# Altium PCB UZ_D_Inverter.PcbDoc
Units mm, origin at the board's own origin, x right, y up, seen from the top; angles counter-clockwise.
Board outline 155.99 x 100.01 mm, 6 copper layers (Top Copper, Signal Layer 1, Signal Layer 2, Signal Layer 3, Signal Layer 4, Bottom Copper), stack 1.597 mm thick; 16 components, 56 nets, 155 pads, 0 vias.
Unrouted connection lines stored in the file: 166.
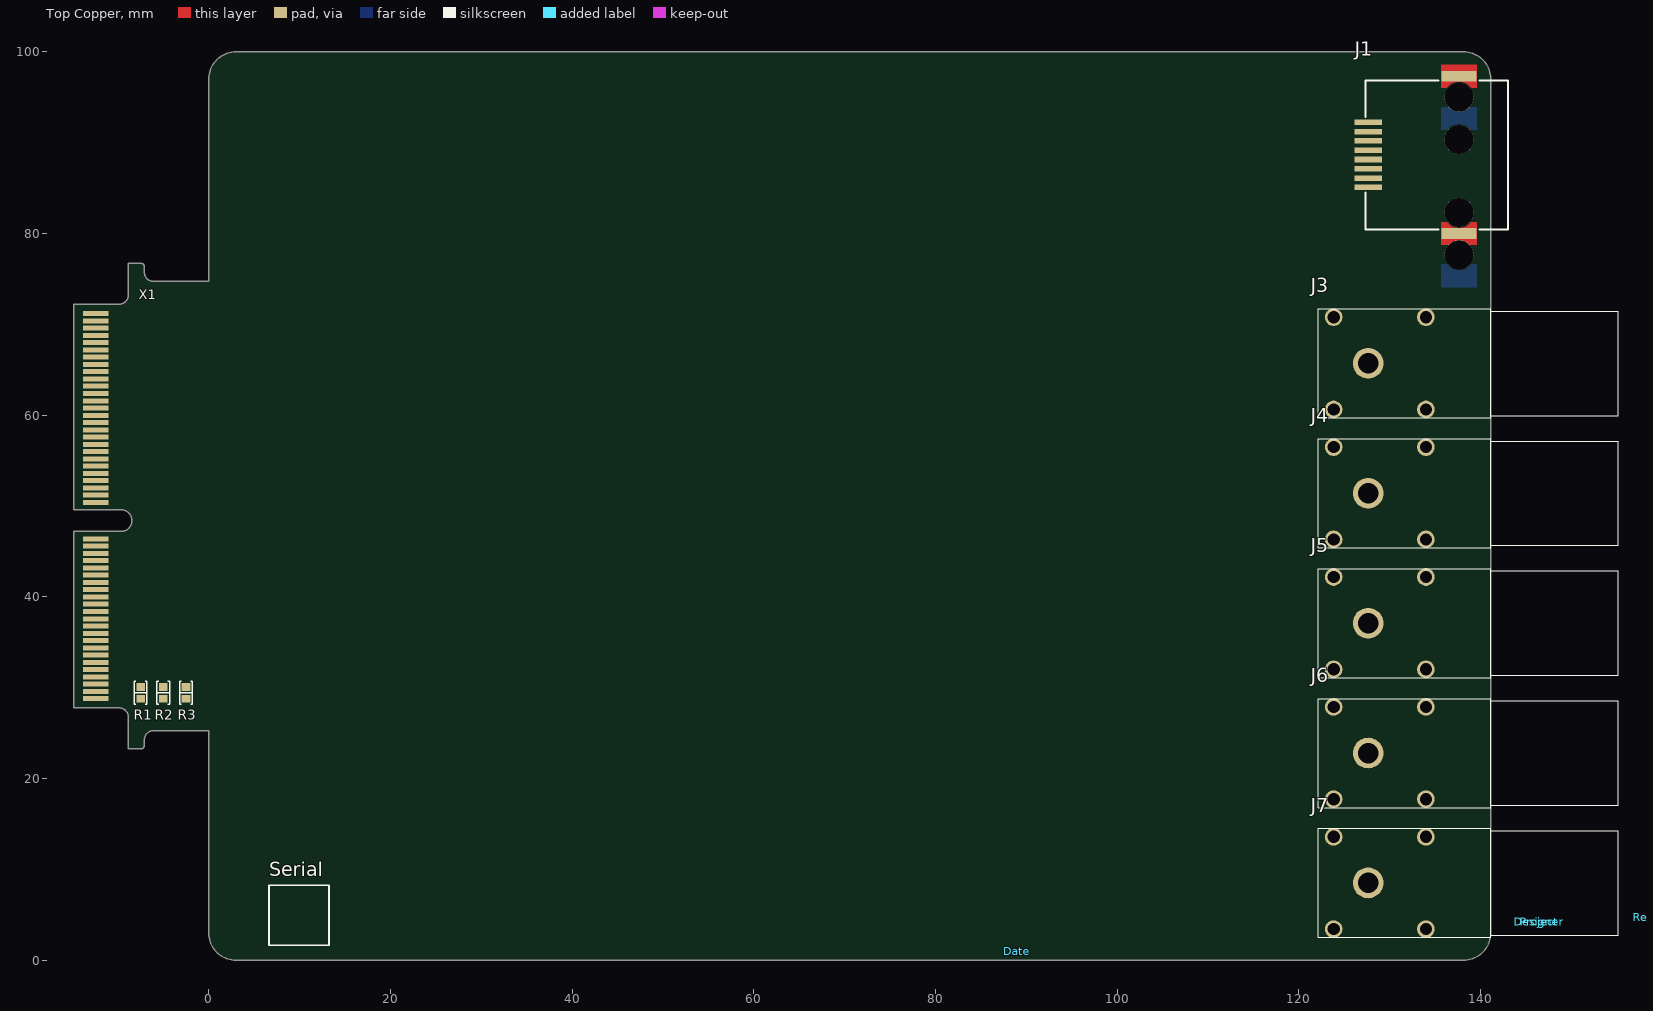
[diagram p0: Top Copper view]
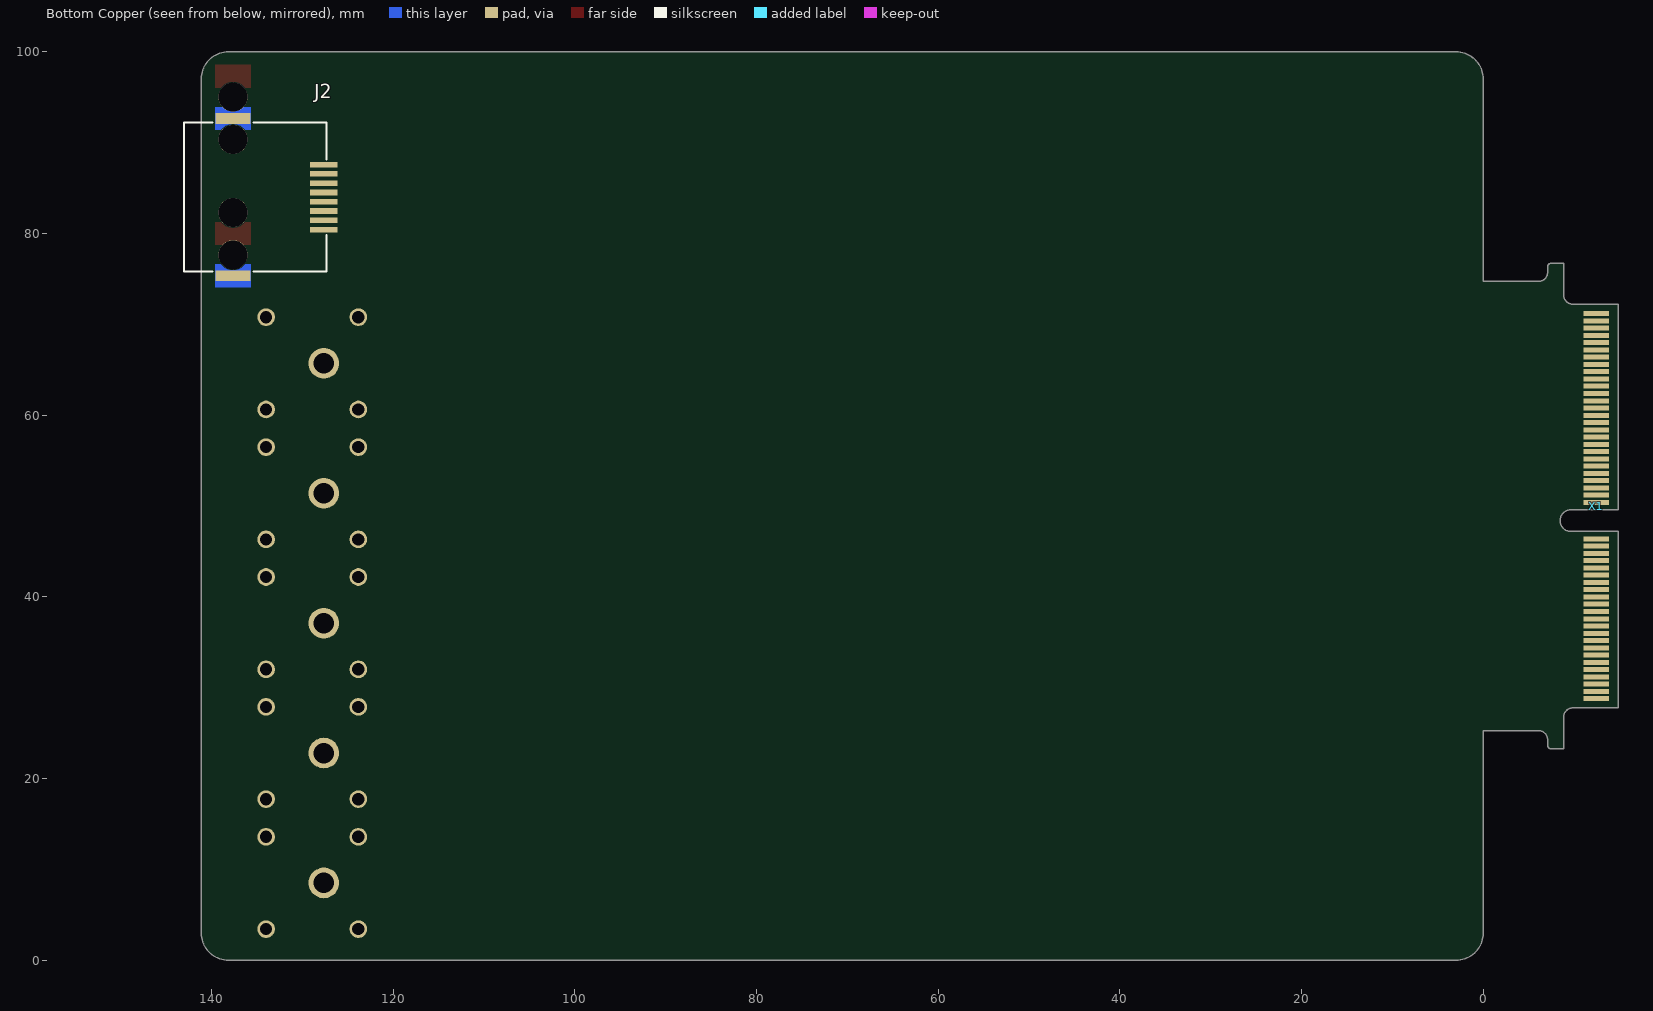
[diagram p1: Bottom Copper view, seen from below]

## Layer stack, top to bottom
Top Mask: solder mask 0.015, Solder Resist, Dk 3.8
Top Copper: signal copper 0.035
Dielectric 1: prepreg 0.1, 2313, Dk 4.05
Signal Layer 1: signal copper 0.0175
Core 1: core 0.565, FR-4, Dk 4.5
Signal Layer 2: signal copper 0.0175
Dielectric 2: prepreg 0.127, 2116, Dk 4.25
Signal Layer 3: signal copper 0.0175
Core 2: core 0.565, FR-4, Dk 4.5
Signal Layer 4: signal copper 0.0175
Dielectric 3: prepreg 0.1, 2313, Dk 4.05
Bottom Copper: signal copper 0.035
Bottom Mask: solder mask 0.015, Solder Resist, Dk 3.8

## Board outline
-14.853,27.775 -9.853,27.775 cw(c-9.853,26.775) -8.853,26.775 -8.853,23.275 -7.473,23.275 ccw(c-7.473,23.675) -7.073,23.675 -7.073,24.275 cw(c-6.073,24.275) -6.073,25.275 0,25.275 0,3 ccw(c3,3) 3,0 138.141,0 ccw(c138.141,3) 141.141,3 141.141,97 141.141,97.01 ccw(c138.141,97.01) 138.141,100.01 3,100 ccw(c3,97) 0,97 0,74.725 -6.073,74.725 cw(c-6.073,75.725) -7.073,75.725 -7.073,76.325 ccw(c-7.473,76.325) -7.473,76.725 -8.853,76.725 -8.853,73.225 cw(c-9.853,73.225) -9.853,72.225 -14.853,72.225 -14.853,49.6 -9.653,49.6 cw(c-9.653,48.4) -9.653,47.2 -14.853,47.2

## Design rules (kind name [scope] priority, off if disabled: settings)
AssemblyTestPointUsage [InNetClass('3V3_SingleEnded') or InNetClass('5V_SingleEnded') or InNetClass('15V_SingleEnded') or InNetClass('DifferentialSignals')] p1:
Clearance Clearance_Differential [InNetClass('DifferentialSignals')] p1: gap=0.1 ignorepadtopadclearanceinfootprint=TRUE except(0: Arc-Hole Track-Hole SMDPad-Hole THPad-Hole Via-Hole Fill-Hole Poly-Hole Region-Hole Text-Hole; 0.3: SMDPad-Via; 0.4: THPad-Via)
Clearance Clearance_Power [InNetClass('Power')] p2: gap=0.1 ignorepadtopadclearanceinfootprint=TRUE except(0: Arc-Hole Track-Hole SMDPad-Hole THPad-Hole Via-Hole Fill-Hole Poly-Hole Region-Hole Text-Hole; 0.15: Via-Poly; 0.2: Track-Poly; 0.25: THPad-Poly; 0.3: Fill-Poly Poly-Region; 0.5: Poly-Poly)
Clearance [All] p3: gap=0.1 ignorepadtopadclearanceinfootprint=TRUE except(0: Arc-Hole Track-Hole SMDPad-Hole THPad-Hole Via-Hole Fill-Hole Poly-Hole Region-Hole Text-Hole; 0.4: SMDPad-Via THPad-Via; 0.5: Poly-Poly)
ComponentClearance [All] p1: gap=0.1 collisioncheckmode=3 verticalgap=0.1 showdistances=FALSE
DiffPairsRouting [InNetClass('DifferentialSignals')] p1: maxlimit=0.25 minlimit=0.127 mostfreqgap=0.25 toplayer_maxgap=0.127 toplayer_prefgap=0.127 toplayer_minwidth=0.285 toplayer_maxwidth=0.285 toplayer_prefwidth=0.285 midlayer1_minwidth=0.069 midlayer1_maxwidth=0.15 midlayer1_prefwidth=0.15 midlayer2_mingap=0.165 midlayer2_minwidth=0.1 midlayer2_maxwidth=0.15 midlayer2_prefwidth=0.15 midlayer3_minwidth=0.381 midlayer3_maxwidth=0.381 midlayer3_prefwidth=0.381 midlayer4_minwidth=0.381 midlayer4_maxwidth=0.381 midlayer4_prefwidth=0.381 bottomlayer_maxgap=0.127 bottomlayer_prefgap=0.127 bottomlayer_minwidth=0.285 bottomlayer_maxwidth=0.285 bottomlayer_prefwidth=0.285 impedanceprofiledriven=TRUE maxuncoupledlength=12.7
FanoutControl Fanout_Power [InNetClass('Power') or InNet('ENABLE')] p1: bgadir=Out bgaviamode=Centered fanoutstyle=Auto fanoutdirection=None viagrid=0.025
FanoutControl Fanout_RS422 [InNetClass('DifferentialSignals')] p2: bgadir=Out bgaviamode=Closest fanoutstyle=Rows fanoutdirection=OutOnly viagrid=0.025
FanoutControl Fanout_BGA [IsBGA] p3 off: bgadir=Out bgaviamode=Centered fanoutstyle=Auto fanoutdirection=Alternating viagrid=0.025 // Fanout_BGA (Default Rule)
FanoutControl Fanout_LCC [IsLCC] p4 off: bgadir=Out bgaviamode=Centered fanoutstyle=Auto fanoutdirection=Alternating viagrid=0.025 // Fanout_LCC (Default Rule)
FanoutControl Fanout_SOIC [IsSOIC] p5 off: bgadir=Out bgaviamode=Centered fanoutstyle=Auto fanoutdirection=Alternating viagrid=0.025 // Fanout_SOIC (Default Rule)
FanoutControl Fanout_Small [(CompPinCount < 5)] p6 off: bgadir=Out bgaviamode=Centered fanoutstyle=Auto fanoutdirection=OutThenIn viagrid=0.025 // Fanout_Small (Default Rule)
FanoutControl Fanout_Default [All] p7: bgadir=NE bgaviamode=Closest fanoutstyle=Rows fanoutdirection=InOnly viagrid=0.025 // Fanout_Default (Default Rule)
Height [All] p1: minheight=0 maxheight=50 prefheight=12.7
HoleSize [All] p1: absolutevalues=TRUE maxlimit=4 minlimit=0.025 maxpercent=80.000 minpercent=20.000
PolygonConnect PolygonConnect_Therm [HoleSize > 2.6] p1: connectstyle=Direct reliefconductorwidth=0.254 reliefentries=4 polygonreliefangle="90 Angle" airgapwidth=0.254
PolygonConnect PolygonConnect_via [InPadClass('pad') or IsVia] p2: connectstyle=Direct reliefconductorwidth=0.254 reliefentries=4 polygonreliefangle="90 Angle" airgapwidth=0.254
PolygonConnect [All] p3: connectstyle=Relief reliefconductorwidth=0.3 reliefentries=4 polygonreliefangle="90 Angle" airgapwidth=0.25
RoutingLayers RoutingLayers_3V3Signals [InNetClass('3V3_SingleEnded')] p1 off: top layer_v5=TRUE mid layer 1_v5=TRUE mid layer 2_v5=TRUE mid layer 3_v5=TRUE mid layer 4_v5=TRUE bottom layer_v5=TRUE
RoutingLayers RoutingLayers_SingleEnded [InNetClass('15V_SingleEnded') or InNetClass('3V3_SingleEnded') or InNetClass('5V_SingleEnded')] p2 off: top layer_v5=TRUE mid layer 1_v5=TRUE mid layer 2_v5=TRUE mid layer 3_v5=TRUE mid layer 4_v5=TRUE bottom layer_v5=TRUE
RoutingLayers RoutingLayers_Differential [InNetClass('DifferentialSignals')] p3 off: top layer_v5=TRUE mid layer 1_v5=TRUE mid layer 2_v5=TRUE mid layer 3_v5=TRUE mid layer 4_v5=TRUE bottom layer_v5=FALSE
RoutingLayers [All] p4: top layer_v5=TRUE mid layer 1_v5=TRUE mid layer 2_v5=TRUE mid layer 3_v5=TRUE mid layer 4_v5=TRUE bottom layer_v5=TRUE
RoutingVias [All] p1: holewidth=0.3 width=0.5 viastyle="Through Hole" minholewidth=0.2 minwidth=0.4 maxholewidth=0.5 maxwidth=1
SolderMaskExpansion [All] p1: expansion=0.102 istentingtop=FALSE
UnRoutedNet UnRoutedNet_Signals [InNetClass('15V_SingleEnded') or InNetClass('3V3_SingleEnded') or InNetClass('5V_SingleEnded') or InNetClass('DifferentialSignals')] p1: checkbadconnections=TRUE
UnRoutedNet [All] p2: checkbadconnections=TRUE
Width Width_Power [InNetClass('Power')] p1: maxlimit=10 minlimit=0.2 preferedwidth=0.3 midlayer3_minwidth=0.254 midlayer3_maxwidth=0.254 midlayer3_prefwidth=0.254 midlayer4_minwidth=0.254 midlayer4_maxwidth=0.254 midlayer4_prefwidth=0.254 minimp=50.000000 maximp=50.000000 favimp=50.000000
Width [All] p2: maxlimit=10 minlimit=0.1 preferedwidth=0.3 midlayer1_prefwidth=0.15 midlayer2_prefwidth=0.15 midlayer3_prefwidth=0.1 midlayer4_prefwidth=0.1 minimp=50.000000 maximp=50.000000 favimp=50.000000
18 further rules are at their usual default settings.

## Classes and differential pairs
component class Connectors: J1 J2 J3 J4 J6 J7
component class X1: R1 R2 R3 X1

## Components (designator, comment, footprint, x,y, rotation, side; value= is the part's Value field where it differs from the comment)
Date "" Comment 89,1 r0 top
Designer "A. Musterfrau" Designator:comment 146.479,4.247 r90 top value="D. Hufnagel"
J1 "634008149821" 634008149821 135.165,88.661 r90 top
J2 "634008149821" 634008149821 135.165,84.011 r270 bottom
J3 "FCR7350R, V_DC" FCR7350 138.618,65.71 r0 top value="PCB mount 4mm jack, Red FCR7350R, 1000V, 24A"
J4 "FCR7350L, GND" FCR7350 138.618,51.41 r0 top value="PCB mount 4mm jack, Blue FCR7350L, 1000V, 24A"
J5 "FCR7350B, V_a" FCR7350 138.618,37.11 r0 top value="PCB mount 4mm jack, Black	FCR7350B, 1000V, 24A"
J6 "FCR7350B, V_b" FCR7350 138.618,22.81 r0 top value="PCB mount 4mm jack, Black	FCR7350B, 1000V, 24A"
J7 "FCR7350B, V_c" FCR7350 138.618,8.51 r0 top value="PCB mount 4mm jack, Black	FCR7350B, 1000V, 24A"
Project "UZ_D_Inverter_Template" Designator:comment 146.479,4.247 r90 top
R1 "0R" "RES 0603_1608" -7.5,29.44 r90 top
R2 "0R" "RES 0603_1608" -5,29.44 r270 top
R3 "0R" "RES 0603_1608" -2.5,29.44 r270 top
Revision "Rev01" Designator:comment 159.379,4.747 r90 top
Serial "Serial #" SERIAL 11.24,2.86 r180 top
X1 "HSEC8-150-01-XX-DV-A-BL-CARD" HSEC8-150-01-XX-DV-A-BL-CARD -14.84,49.991 r270 bottom

## Footprints (in the part's own frame and the unit in brackets; to place one, negate y for a bottom-side part, rotate by r counter-clockwise, add the part's x,y. Pads: shape width x height; smd on the part's side, far side on the other; paste and mask are expansions set on the pad)
634008149821 [mm] "Modular Jack Horizontal Shielded SMT 8P8C Tab Up"
  rect 0.61x3.05 smd: 1(3.57,7.505) 2(2.55,7.505) 3(1.53,7.505) 4(0.51,7.505) 5(-0.51,7.505) 6(-1.53,7.505) 7(-2.55,7.505) 8(-3.57,7.505)
  round 3.2 hole 3.2 unplated: M1(-6.35,-2.475) M2(6.35,-2.475)
  rect 1.2x3.89 smd paste-403.566 mask-403.566: Shell(-8.66,-2.475) Shell(8.66,-2.475)
  Top Copper region: -9.91,-4.42 -7.41,-4.42 -7.41,-3.807 -7.883,-3.214 -8.052,-2.475 -7.883,-1.736 -7.41,-1.143 -7.41,-1.143 -7.41,-0.53 -9.91,-0.53
  Top Copper region: 9.91,-4.42 7.41,-4.42 7.41,-3.807 7.883,-3.214 8.052,-2.475 7.883,-1.736 7.41,-1.143 7.41,-1.143 7.41,-0.53 9.91,-0.53
  silkscreen extent -8.2,-7.87 8.2,7.83, body extent -9.4,-7.88 9.4,8.42, height 13.45
Comment [mm] "Displays only the comment of the PCB component"
Designator:comment [mm] "prints out designator and comment of a component"
FCR7350 [mil]
  round 76.5 hole 53.15: 1(-581.83,200) 2(-581.83,-200) 3(-181.83,-200) 4(-181.83,200)
  round 132.87 hole 88.58: 5(-432.22,0)
  silkscreen extent -649,-236 652,236, body extent -648,-236 651,236, height 485
HSEC8-150-01-XX-DV-A-BL-CARD [mm]
  rect 0.55x2.8 smd far side mask+0.05: 1(-21.2,-2.4) 3(-20.4,-2.4) 5(-19.6,-2.4) 7(-18.8,-2.4) 9(-18,-2.4) 11(-17.2,-2.4) 13(-16.4,-2.4) 15(-15.6,-2.4) 17(-14.8,-2.4) 19(-14,-2.4) 21(-13.2,-2.4) 23(-12.4,-2.4) 25(-11.6,-2.4) 27(-10.8,-2.4) 29(-10,-2.4) 31(-9.2,-2.4) 33(-8.4,-2.4) 35(-7.6,-2.4) 37(-6.8,-2.4) 39(-6,-2.4) 41(-5.2,-2.4) 43(-4.4,-2.4) 45(-3.6,-2.4) 47(-2.8,-2.4) 49(-2,-2.4) 51(-1.2,-2.4) 53(-0.4,-2.4) 55(3.6,-2.4) 57(4.4,-2.4) 59(5.2,-2.4) 61(6,-2.4) 63(6.8,-2.4) 65(7.6,-2.4) 67(8.4,-2.4) 69(9.2,-2.4) 71(10,-2.4) 73(10.8,-2.4) 75(11.6,-2.4) 77(12.4,-2.4) 79(13.2,-2.4) 81(14,-2.4) 83(14.8,-2.4) 85(15.6,-2.4) 87(16.4,-2.4) 89(17.2,-2.4) 91(18,-2.4) 93(18.8,-2.4) 95(19.6,-2.4) 97(20.4,-2.4) 99(21.2,-2.4)
  rect 0.55x2.8 smd mask+0.05: 2(-21.2,-2.4) 4(-20.4,-2.4) 6(-19.6,-2.4) 8(-18.8,-2.4) 10(-18,-2.4) 12(-17.2,-2.4) 14(-16.4,-2.4) 16(-15.6,-2.4) 18(-14.8,-2.4) 20(-14,-2.4) 22(-13.2,-2.4) 24(-12.4,-2.4) 26(-11.6,-2.4) 28(-10.8,-2.4) 30(-10,-2.4) 32(-9.2,-2.4) 34(-8.4,-2.4) 36(-7.6,-2.4) 38(-6.8,-2.4) 40(-6,-2.4) 42(-5.2,-2.4) 44(-4.4,-2.4) 46(-3.6,-2.4) 48(-2.8,-2.4) 50(-2,-2.4) 52(-1.2,-2.4) 54(-0.4,-2.4) 56(3.6,-2.4) 58(4.4,-2.4) 60(5.2,-2.4) 62(6,-2.4) 64(6.8,-2.4) 66(7.6,-2.4) 68(8.4,-2.4) 70(9.2,-2.4) 72(10,-2.4) 74(10.8,-2.4) 76(11.6,-2.4) 78(12.4,-2.4) 80(13.2,-2.4) 82(14,-2.4) 84(14.8,-2.4) 86(15.6,-2.4) 88(16.4,-2.4) 90(17.2,-2.4) 92(18,-2.4) 94(18.8,-2.4) 96(19.6,-2.4) 98(20.4,-2.4) 100(21.2,-2.4)
"RES 0603_1608" [mm] "Chip Resistor, 2-Leads, Body 1.60x0.80mm, IPC Medium Density"
  rect 0.85x0.95 smd: 1(-0.65,0) 2(0.65,0)
  silkscreen extent -1.27,-0.7 1.27,0.7, body extent -0.8,-0.4 0.8,0.4, height 0.45
SERIAL [mm]
  silkscreen extent -2,-5.4 4.6,1.2

## Part data
Date: library part ProjectDate, "Year and month of the design finish", Created=2020-01-08_Thilo_Wendt
Designer: library part ProjectAuthor, Created=2020-01-08_Thilo_Wendt
J1 J2: "CAT5, RJ45 Connector, 1 port SMD", Contact Resistance=20mOhm, Device Package=RJ45, Insulation Resistance=500MOhm, Manufacturer="Wuerth Elektronik", Operating Temperature Max=85°C, Operating Temperature Min=-40°C, Rated Current=1.5A, Supplier Part Number 1=710-634008149821, Withstanding Voltage=1000VAC, Working Voltage=120VAC, Category="Input/Output Connectors", Component Type="RJ45 Connector", ComponentLink1Description=Datasheet, ComponentLink1URL=https://www.mouser.de/datasheet/2/445/634008149821-1718453.pdf, ComponentLink2Description=Datasheet, ComponentLink2URL=https://www.we-online.com/redexpert/spec/634008149821?ad, Created from=DHufnagel, Created On="15.06.2022 07:42:55", Last Updated="15.06.2022 07:42:55", LED=No, Live Cycle Status=1, Manufacturer Part Number=634008149821, Match Code=WR-MJ, Mount="Surface Mount", Mounting Type=SMD, Number of Pins=8P8C, Number of Ports=1, Orientation=Horizontal, Packaging=Tray, PartID=6, Series=WR-MJ, Shielding=Yes, Stock number="not stored", Supplier 1=Mouser, Type="RJ45 Connector"
J3: library part FCR7350R, "FCR7350B, 1000V, 24A, RED", Device Package=THT, Manufacturer=Cliff, Operating Temperature="-40°C - 80°C", Supplier Part Number 1=3185-FCR7350R-ND, Component Type="PCB mount 4mm jack, Red", ComponentLink1Description=datasheet, ComponentLink1URL=https://www.cliffuk.co.uk/products/testleads/sockets/S16NPC.pdf, ComponentLink2Description=drawing, ComponentLink2URL=https://media.digikey.com/pdf/Data%20Sheets/Cliff%20Electronic%20LTD%20PDF's/FCR7350_Drawing.pdf, Created from=DHufnagel, Created On="13.06.2022 10:18:11", Last Updated="28.06.2022 13:58:37", Live Cycle Status=1, Manufacturer Part Number=FCR7350R, Minimum Order=1, Mounting Type=THT, PartID=7, Series=S16N-PC, Stock number="not stored", Supplier 1=Digi-Key, Supplier 2=farnell, Supplier Part Number 2=1854508, Type="PCB mount 4mm jack, Red FCR7350R, 1000V, 24A"
J4: library part FCR7350L, "FCR7350B, 1000V, 24A, BLUE", Device Package=THT, Manufacturer=Cliff, Operating Temperature="-40°C - 80°C", Supplier Part Number 1=3185-FCR7350L-ND, Component Type="PCB mount 4mm jack, Blue", ComponentLink1Description=datasheet, ComponentLink1URL=https://www.cliffuk.co.uk/products/testleads/sockets/S16NPC.pdf, ComponentLink2Description=drawing, ComponentLink2URL=https://media.digikey.com/pdf/Data%20Sheets/Cliff%20Electronic%20LTD%20PDF's/FCR7350_Drawing.pdf, Created from=DHufnagel, Created On="13.06.2022 10:18:11", Last Updated="28.06.2022 13:58:37", Live Cycle Status=1, Manufacturer Part Number=FCR7350L, Minimum Order=1, Mounting Type=THT, PartID=8, Series=S16N-PC, Stock number="not stored", Supplier 1=Digi-Key, Supplier 2=farnell, Supplier Part Number 2=1854511, Type="PCB mount 4mm jack, Blue FCR7350L, 1000V, 24A"
J5 J6 J7: library part FCR7350B, "FCR7350B, 1000V, 24A, BLACK", Device Package=THT, Manufacturer=Cliff, Operating Temperature="-40°C - 80°C", Supplier Part Number 1=3185-FCR7350B-ND, Component Type="PCB mount 4mm jack, Black", ComponentLink1Description=datasheet, ComponentLink1URL=https://www.cliffuk.co.uk/products/testleads/sockets/S16NPC.pdf, ComponentLink2Description=drawing, ComponentLink2URL=https://media.digikey.com/pdf/Data%20Sheets/Cliff%20Electronic%20LTD%20PDF's/FCR7350_Drawing.pdf, Created from=DHufnagel, Created On="13.06.2022 10:18:11", Last Updated="28.06.2022 13:58:37", Live Cycle Status=1, Manufacturer Part Number=FCR7350B, Minimum Order=1, Mounting Type=THT, PartID=6, Series=S16N-PC, Stock number="not stored", Supplier 1=Digi-Key, Supplier 2=farnell, Supplier Part Number 2=1854507, Type="PCB mount 4mm jack, Black	FCR7350B, 1000V, 24A"
Project: library part ProjectName, Created=2020-01-08_Thilo_Wendt
R1 R2 R3: library part RC0603JR-070RL, "SMD resistor E24 series", Device Package=0603, LCSC Part Number=C21189, Manufacturer=YAGEO, Supplier Part Number 1=603-RC0603JR-070RL, Tolerance=5%, Component Type="SMD resistor", ComponentLink1Description=Datasheet, ComponentLink1URL=https://www.mouser.de/datasheet/2/447/PYu-RC_Group_51_RoHS_L_10-1664068.pdf, Created from=MGremer, Created On="14.12.2020 16:17:14", Last Updated="04.03.2021 09:09:42", Live Cycle Status=1, Manufacturer Part Number=RC0603JR-070RL, Mounting Type=SMD, PartID=1, Stock number="Labor SMD Container", Supplier 1=Mouser, Supplier 2=LCSC, Supplier Part Number 2=C21189, Type=Resistor
Revision: library part ProjectRevision, Created=2020-01-08_Thilo_Wendt
Serial: library part SerialNumber, "Empty serial number of the PCB. Can be used for manually writing the serial number"
X1: "Mating Card Layout for HSEC8-150-01-XX-DV-A-BL", Manufacturer=SAMTEC, Created=2018_04_23_AGeiger

## Nets (pads, with @x,y where several pads share a name; then routed paths per layer and width w, separated by ;. In a path a pad name is that pad's centre, name@x,y a point inside that pad or via, vN(x,y) a via of type N, cw(c..) or ccw(c..) an arc to the next point about the centre after c; other vN are vias at no path point)
3V3_PER: R3.1 X1.13 X1.14
5V_PER: X1.9 X1.10
DC: J3.1
GND: R2.1 X1.1 X1.2 X1.3 X1.4 X1.7 X1.8 X1.11 X1.12 X1.15 X1.16 X1.19 X1.20 X1.23 X1.24 X1.27 X1.28 X1.31 X1.32 X1.35 X1.36 X1.39 X1.40 X1.43 X1.44 X1.47 X1.48 X1.51 X1.52 X1.55 X1.56 X1.59 X1.60 X1.63 X1.64 X1.67 X1.68 X1.71 X1.72 X1.75 X1.76 X1.81 X1.82 X1.87 X1.88 X1.97 X1.98
H1_FAULT: X1.50
H1_OT: X1.46
H1_TEMP: X1.30
H2_FAULT: X1.74
H2_OT: X1.70
H2_TEMP: X1.54
H3_FAULT: X1.73
H3_OT: X1.69
H3_TEMP: X1.53
I1_DIAG: X1.29
I1_OUT_N: J2.2
I1_OUT_P: J2.1
I2_DIAG: X1.33
I2_OUT_N: J2.6
I2_OUT_P: J2.3
I3_DIAG: X1.37
I3_OUT_N: J2.5
I3_OUT_P: J2.4
I_DIAG: X1.41
I_OUT_N: J1.8
I_OUT_P: J1.7
L1_FAULT: X1.42
L1_OT: X1.38
L1_TEMP: X1.34
L2_FAULT: X1.66
L2_OT: X1.62
L2_TEMP: X1.58
L3_FAULT: X1.65
L3_OT: X1.61
L3_TEMP: X1.57
M2a: J5.1
M2b: J6.1
M2c: J7.1
MP: J4.1
NetR1_1: R1.1 R2.2 R3.2 X1.99
NetR1_2: R1.2 X1.100
PWM_EN: X1.45
PWM_H1#: X1.17
PWM_H2#: X1.21
PWM_H3#: X1.25
PWM_L1#: X1.18
PWM_L2#: X1.22
PWM_L3#: X1.26
U_DC_N: J2.8
U_DC_P: J2.7
U_L1_N: J1.2
U_L1_P: J1.1
U_L2_N: J1.6
U_L2_P: J1.3
U_L3_N: J1.5
U_L3_P: J1.4
VIN: X1.5 X1.6
pads on no net: J1.M1 J1.M2 J1.Shell J2.M1 J2.M2 J2.Shell J3.2 J3.3 J3.4 J3.5 J4.2 J4.3 J4.4 J4.5 J5.2 J5.3 J5.4 J5.5 J6.2 J6.3 J6.4 J6.5 J7.2 J7.3 J7.4 J7.5 X1.49 X1.77 X1.78 X1.79 X1.80 X1.83 X1.84 X1.85 X1.86 X1.89 X1.90 X1.91 X1.92 X1.93 X1.94 X1.95 X1.96

## Silkscreen, mask and mechanical layers (free items; w line width, h text height)
Board Shape:
  lines w0.1: 138.141,-0.001 ccw(c138.141,2.999) 141.141,2.999 141.141,97.01 ccw(c138.141,97.01) 138.141,100.01 3,100 ccw(c3,97) 0,97 0,74.725 -6.073,74.725 cw(c-6.073,75.725) -7.073,75.725 -7.073,76.325 ccw(c-7.473,76.325) -7.473,76.725 -8.853,76.725 -8.853,73.225 cw(c-9.853,73.225) -9.853,72.225 -14.853,72.225 -14.853,49.6 -9.653,49.6 cw(c-9.653,48.4) -9.653,47.2 -14.853,47.2 -14.853,27.775 -9.853,27.775 cw(c-9.853,26.775) -8.853,26.775 -8.853,23.275 -7.473,23.275 ccw(c-7.473,23.675) -7.073,23.675 -7.073,24.275 cw(c-6.073,24.275) -6.073,25.275 0,25.275 0,3 ccw(c3,3) 3,0 138.141,0

## Dimensions
141.141,0 to 141.141,100 on Board Dimensions
146.143,97.802 to -14.84,72.216 on Board Dimensions
141.141,100 to -14.853,72.225 on Board Dimensions
141.141,100 to 0.031,100 on Board Dimensions

## Text inside footprints (layer, text, board x,y; h text height)
Serial: Top Assembly "SerialNr" at 7.44,6.66 h0.7